# Altium PCB PCB1.PcbDoc
Units mm, origin at the board's own origin, x right, y up, seen from the top; angles counter-clockwise.
Board outline 60 x 30 mm, 2 copper layers (Top Layer, Bottom Layer); 19 components, 55 nets, 113 pads, 0 vias.
Unrouted connection lines stored in the file: 48.
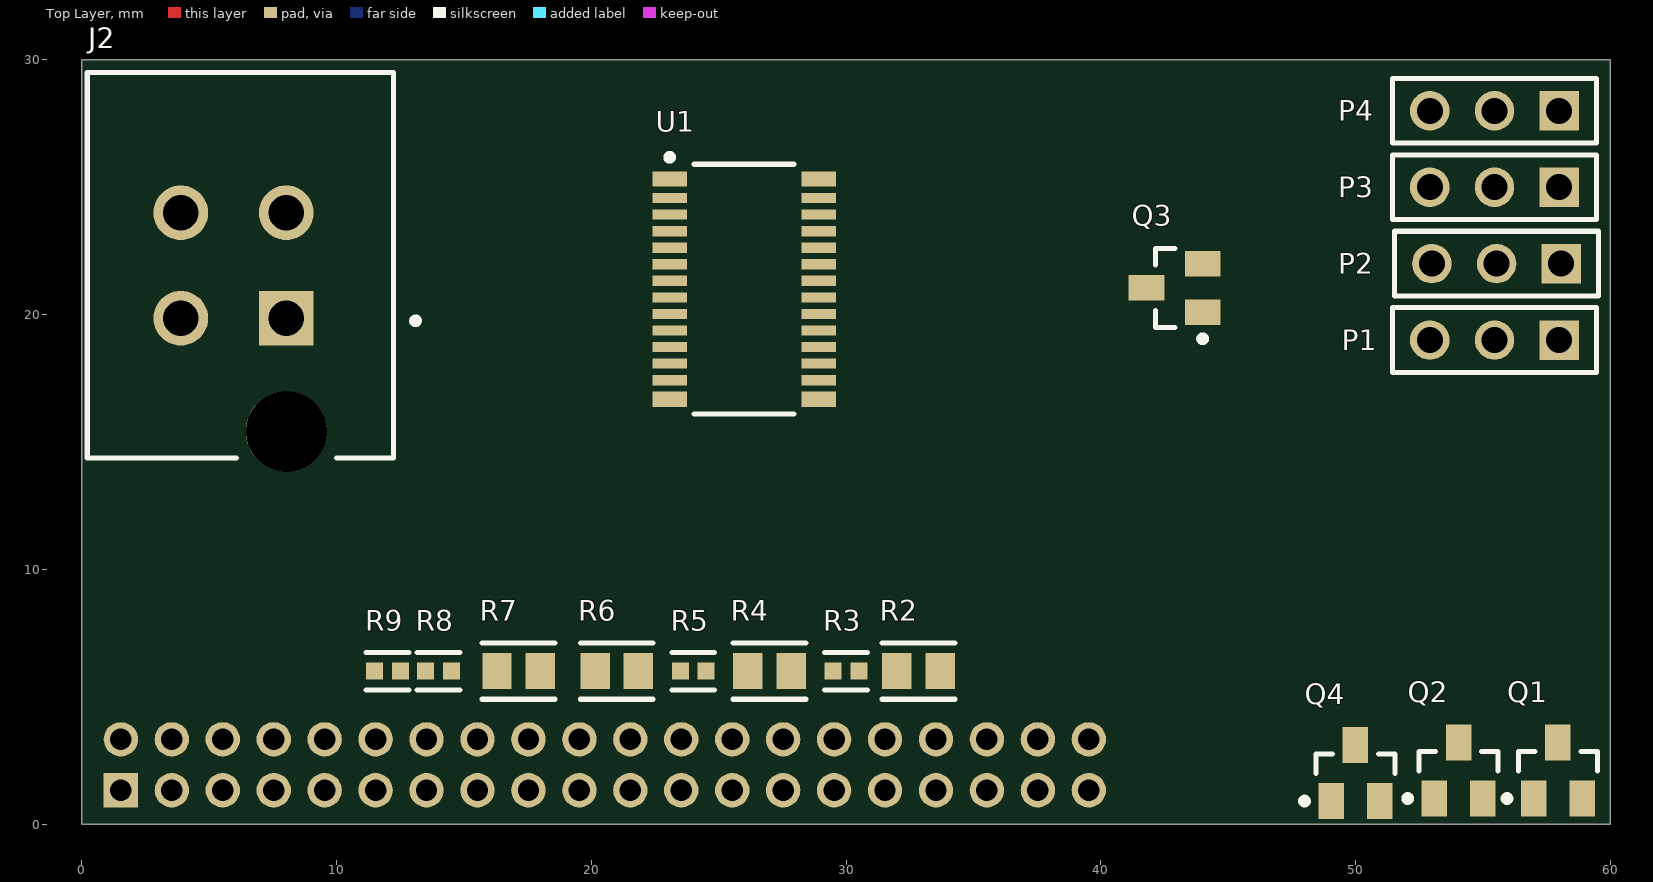
[diagram p0: Top Layer view]
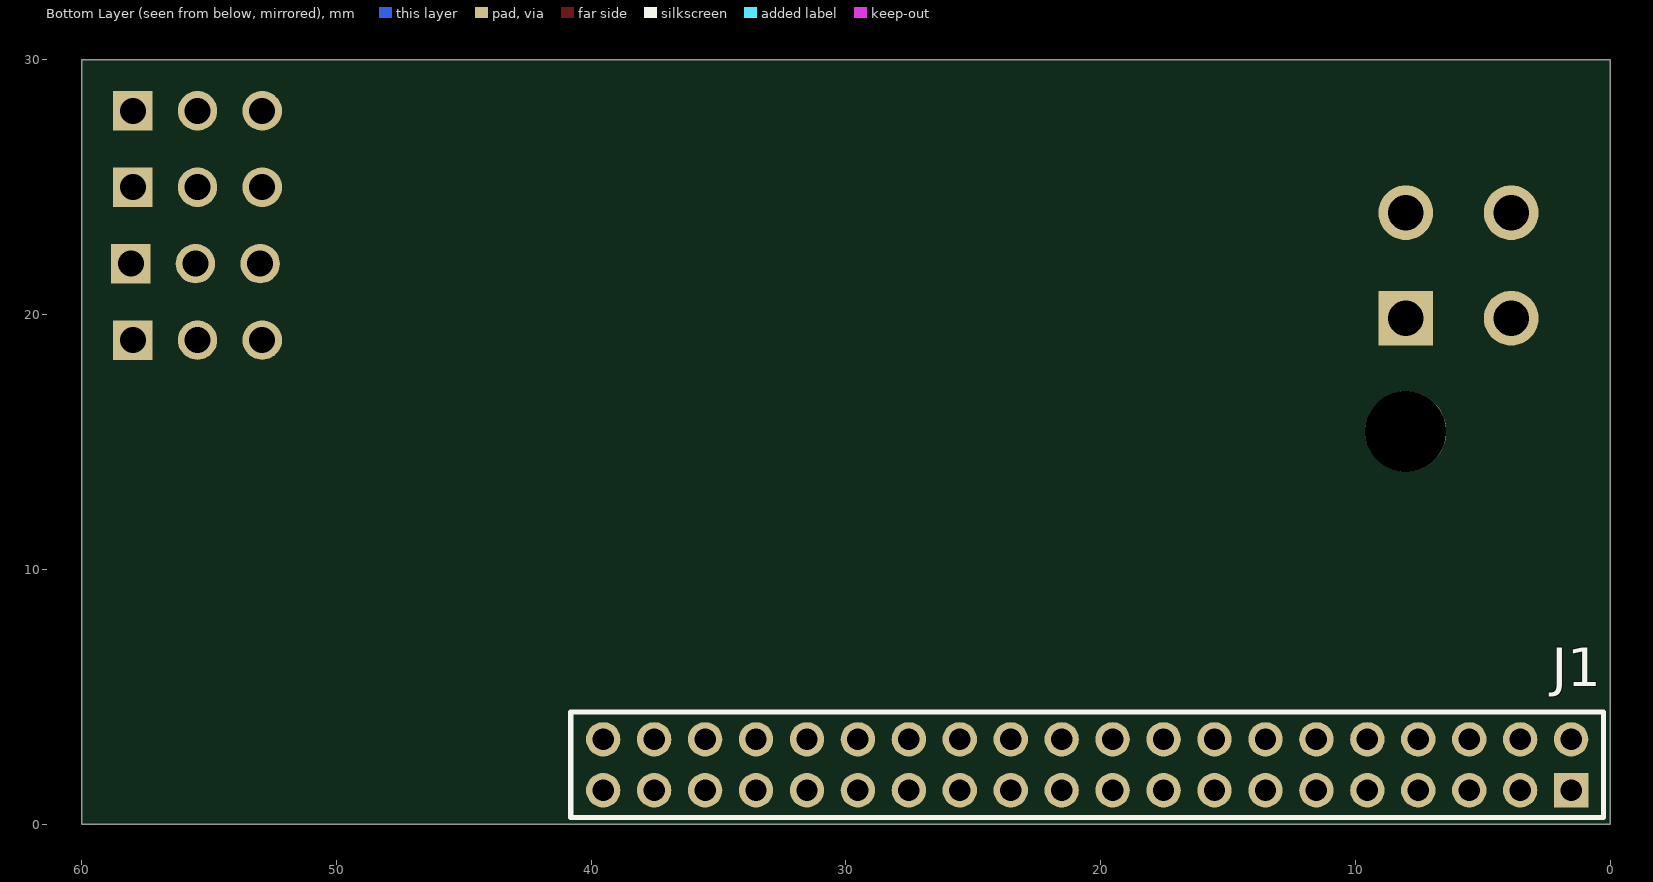
[diagram p1: Bottom Layer view, seen from below]

## Layer stack, top to bottom
Top Solder: solder mask 0.0102, Solder Resist, Dk 3.5
Top Layer: signal copper 0.0356
Dielectric 1: dielectric 0.32, FR-4, Dk 4.8
Bottom Layer: signal copper 0.0356
Bottom Solder: solder mask 0.0102, Solder Resist, Dk 3.5

## Board outline
60,0 0,0 0,30 60,30

## Design rules (kind name [scope] priority, off if disabled: settings)
BoardOutlineClearance [All] p1: gap=0.2 ignorepadtopadclearanceinfootprint=FALSE
Clearance [All] p1: gap=0.127 ignorepadtopadclearanceinfootprint=FALSE except(0.25: Arc-Hole Track-Hole SMDPad-Hole THPad-Hole Via-Hole Fill-Hole Poly-Hole Region-Hole Text-Hole)
ComponentClearance [All] p1: gap=0.127 collisioncheckmode=3 verticalgap=0.127 showdistances=TRUE
DiffPairsRouting [All] p1: maxlimit=0.254 minlimit=0.127 mostfreqgap=0.127 toplayer_minwidth=0.127 toplayer_maxwidth=25.4 toplayer_prefwidth=0.127 bottomlayer_minwidth=0.127 bottomlayer_maxwidth=25.4 bottomlayer_prefwidth=0.127 maxuncoupledlength=12.7
Height [All] p1: minheight=0 maxheight=1816.048 prefheight=12.7
HoleSize [All] p1: absolutevalues=TRUE maxlimit=6.3 minlimit=0.3 maxpercent=80.000 minpercent=20.000
HoleToHoleClearance [All] p1: gap=0.25 allowstackedmicrovias=FALSE
MinimumAnnularRing [All] p1: minimumring=0.076
MinimumSolderMaskSliver [All] p1: minsoldermaskwidth=0
PlaneClearance [All] p1: clearance=0.127
PlaneConnect PlaneConnectPowerPads [InPadClass('PowerPads')] p1: planeconnectstyle=Direct reliefexpansion=0.508 reliefentries=4 reliefconductorwidth=0.254 reliefairgap=0.254
PlaneConnect [All] p2: pad.planeconnectstyle=Relief pad.reliefexpansion=0.3 pad.reliefentries=4 pad.reliefconductorwidth=0.127 pad.reliefairgap=0.127 via.planeconnectstyle=Direct via.reliefexpansion=0.3 via.reliefentries=4 via.reliefconductorwidth=0.127 via.reliefairgap=0.127
PolygonConnect PolygonConnectPowerPads [All vs (InPadClass('PowerPads'))] p1: connectstyle=Direct reliefconductorwidth=0.254 reliefentries=4 polygonreliefangle="90 Angle" airgapwidth=0.254
PolygonConnect [All] p2: thpad.connectstyle=Relief thpad.reliefconductorwidth=0.127 thpad.reliefentries=4 thpad.polygonreliefangle="90 Angle" thpad.airgapwidth=0.127 smdpad.connectstyle=Relief smdpad.reliefconductorwidth=0.127 smdpad.reliefentries=4 smdpad.polygonreliefangle="90 Angle" smdpad.airgapwidth=0.127 via.connectstyle=Direct via.reliefconductorwidth=0.127 via.reliefentries=4 via.polygonreliefangle="90 Angle" via.airgapwidth=0.127
RoutingVias [All] p1: holewidth=0.3 width=0.6 viastyle="Through Hole" minholewidth=0.3 minwidth=0.6 maxholewidth=0.6 maxwidth=6.6
SilkToSilkClearance [All] p1: silktosilkclearance=0
SilkToSolderMaskClearance [IsPad] p1: minsilkscreentomaskgap=0.127 clearancetoexposedcopper=TRUE
SolderMaskExpansion [All] p1: expansion=0.075 istentingtop=FALSE
SupplyNets "Schematic Supply Nets" [InNet('Black (E-)')] p1: voltage=0.000
SupplyNets "Schematic Supply Nets_4" [InNet('5V')] p2: voltage=0.000
SupplyNets "Schematic Supply Nets_3" [InNet('3V3')] p3: voltage=0.000
Width [All] p1: maxlimit=25.4 minlimit=0.127 preferedwidth=0.127 minimp=50.000000 maximp=50.000000 favimp=50.000000
20 further rules are at their usual default settings.

## Classes and differential pairs
component class Main: J2

## Components (designator, comment, footprint, x,y, rotation, side; value= is the part's Value field where it differs from the comment)
J1 "PTF-120-01-L-D" SMTC-PTF-120-01-X-D 1.532,1.325 r0 bottom
J2 "" FP-1-770174-1-MFG 6.22,21.935 r270 top
P1 "TSW-103-07-T-S" SMTC-TSW-103-07-X-S 58,19 r180 top
P2 "TSW-103-07-T-S" SMTC-TSW-103-07-X-S 58.08,22 r180 top
P3 "TSW-103-07-T-S" SMTC-TSW-103-07-X-S 58,25 r180 top
P4 "TSW-103-07-T-S" SMTC-TSW-103-07-X-S 58,28 r180 top
Q1 "MMBT3906" FAIR-SOT23-3_V 57.95,2.1 r90 top
Q2 "MMBT3906" FAIR-SOT23-3_V 54.05,2.1 r90 top
Q3 "MMBT3906" FAIR-SOT23-3_V 42.9,21.05 r180 top
Q4 "MMBT3906" FAIR-SOT23-3_V 50,2 r90 top
R2 "10kΩ" FP-TFCR0805-IPC_B 32.851,6 r0 top
R3 "1kΩ" FP-TFCR0402-IPC_A 30,6 r0 top
R4 "10kΩ" FP-TFCR0805-IPC_B 27,6 r0 top
R5 "1kΩ" FP-TFCR0402-IPC_A 24,6 r0 top
R6 "10kΩ" FP-TFCR0805-IPC_B 21,6 r0 top
R7 "10kΩ" FP-TFCR0805-IPC_B 17.149,6 r0 top
R8 "1kΩ" FP-TFCR0402-IPC_A 14,6 r0 top
R9 "1kΩ" FP-TFCR0402-IPC_A 12,6 r0 top
U1 "PCA9685PW/Q900,118" SOT361-1_V 26,21 r0 top

## Footprints (in the part's own frame and the unit in brackets; to place one, negate y for a bottom-side part, rotate by r counter-clockwise, add the part's x,y. Pads: shape width x height; smd on the part's side, far side on the other; paste and mask are expansions set on the pad)
FAIR-SOT23-3_V [mm] "SOT23, 3-Leads, Body 3.12x1.5mm, Pitch 0.95mm"
  rect 1.4x1 smd: 1(-1.1,0.95) 2(-1.1,-0.95) 3(1.1,0)
  silkscreen extent -1.22,-1.55 0.75,2.12, body extent -1.35,-1.56 1.35,1.56, height 1.2
FP-1-770174-1-MFG [mm]
  rect 2.15x2.15 hole 1.4 paste-2539.97 mask+0: 1(2.075,1.805)
  round 2.15 hole 1.4 paste-2539.97 mask+0: 2(-2.065,1.805) 3(2.075,-2.335) 4(-2.065,-2.335)
  round 3.18 hole 3.18 unplated paste-2539.97 mask+0: ""(6.525,1.805)
  silkscreen extent -7.57,-6.01 7.57,7, body extent -7.67,-6.11 8.22,6.11, height 0.25
FP-TFCR0402-IPC_A [mm]
  rect 0.665x0.672 smd paste+0 mask+0: 1(-0.504,0) 2(0.504,0)
  silkscreen extent -0.84,-0.74 0.84,0.74, body extent -1.04,-0.54 1.04,0.54, height 0.25
FP-TFCR0805-IPC_B [mil]
  rect 45.5x55.44 smd paste+0 mask+0: 1(-33.51,0) 2(33.51,0)
  silkscreen extent -56,-43 56,43, body extent -66,-38 66,38, height 10
SMTC-PTF-120-01-X-D [mm] "Press Fit Socket Assembly, 2x8 Pins, Vertical, 2mm Pitch, Female"
  rect 1.35x1.35 hole 0.838: 1(0,0)
  round 1.35 hole 0.838: 2(0,-2) 3(2,0) 4(2,-2) 5(4,0) 6(4,-2) 7(6,0) 8(6,-2) 9(8,0) 10(8,-2) 11(10,0) 12(10,-2) 13(12,0) 14(12,-2) 15(14,0) 16(14,-2) 17(16,0) 18(16,-2) 19(18,0) 20(18,-2) 21(20,0) 22(20,-2) 23(22,0) 24(22,-2) 25(24,0) 26(24,-2) 27(26,0) 28(26,-2) 29(28,0) 30(28,-2) 31(30,0) 32(30,-2) 33(32,0) 34(32,-2) 35(34,0) 36(34,-2) 37(36,0) 38(36,-2) 39(38,0) 40(38,-2)
  silkscreen extent -1.27,-3.08 39.27,1.07, body extent -1.15,-3 39.15,1, height 6.35
SMTC-TSW-103-07-X-S [mm] ".025 SQ Post Terminal Strip Assembly, 1x3 Pins, Vertical, 2.54mm Pitch, Male"
  rect 1.55x1.55 hole 1.02: 1(0,0)
  round 1.55 hole 1.02: 2(2.54,0) 3(5.08,0)
  silkscreen extent -1.46,-1.27 6.54,1.27, body extent -1.27,-1.27 6.35,1.27, height 8.38
SOT361-1_V [mm] "SOP, 28-Leads, Body 9.7x4.4mm, Pitch 0.65mm, NXP Recommended"
  rect 1.35x0.6 smd: 1(-2.925,4.325) 14(-2.925,-4.325) 15(2.925,-4.325) 28(2.925,4.325)
  rect 1.35x0.4 smd: 2(-2.925,3.575) 3(-2.925,2.925) 4(-2.925,2.275) 5(-2.925,1.625) 6(-2.925,0.975) 7(-2.925,0.325) 8(-2.925,-0.325) 9(-2.925,-0.975) 10(-2.925,-1.625) 11(-2.925,-2.275) 12(-2.925,-2.925) 13(-2.925,-3.575) 16(2.925,-3.575) 17(2.925,-2.925) 18(2.925,-2.275) 19(2.925,-1.625) 20(2.925,-0.975) 21(2.925,-0.325) 22(2.925,0.325) 23(2.925,0.975) 24(2.925,1.625) 25(2.925,2.275) 26(2.925,2.925) 27(2.925,3.575)
  silkscreen extent -3.05,-4.9 1.96,5.3, body extent -2.2,-4.85 2.2,4.85, height 1.1

## Part data
J1: library part CMP-1022-00122-1, "Press Fit Socket, Through-hole, Vertical, -55 to 125 degC, 2 mm Pitch, 40-Pin, Female, RoHS", Manufacturer=Samtec, Temperature Range="-55 to 125 degC", ComponentLink1Description="Manufacturer URL", ComponentLink1URL=http://www.samtec.com, ComponentLink2Description=Datasheet, ComponentLink2URL=http://www.samtec.com/documents/webfiles/pdf/PTF.PDF, ComponentLink3Description="Package Specification", ComponentLink3URL=http://www.samtec.com/documents/webfiles/cpdf/PTF-1XX-XX-X-D-XXX-MKT.pdf, DatasheetVersion=F-214, Mounting Technology=Through-hole, Orientation=Vertical, PackageDescription="2mm Press Fit Socket Assembly", PackageReference=PTF-120-01-X-D, PackageVersion="H, 4/2000", PartNumber=PTF-120-01-L-D, Pitch="2 mm", RoHS=True
J2: library part CMP-03369-000042-1, "CONN HEADER VERT 4POS 4.14MM", Current Rating=9.5A, Manufacturer="TE Connectivity", Manufacturer Part Number=1-770174-1, Temperature="-55°C to +105°C", Temperature Range High=+105°C, Temperature Range Low=-55°C, Voltage Rating=600V, Automotive=No, Category=Conn, ComponentLink2Description=Datasheet, ComponentLink2URL=https://www.te.com/commerce/DocumentDelivery/DDEController?Action=showdoc&DocId=Catalog+Section%7F82181_SOFTSHELL_HIGH_DENSITY%7F0508%7Fpdf%7FEnglish%7FENG_CS_82181_SOFTSHELL_HIGH_DENSITY_0508.pdf%7F1-770174-1, Conn Gender=Male, Conn Orientation=Vertical, Contact Material=Tin,Nickel, Device Class L1=Connectors, Device Class L2="Headers and Wire Housings", Device Class L3=unset, Digikey Description="CONN HEADER VERT 4POS 4.14MM", Footprint Url=https://www.te.com/commerce/DocumentDelivery/DDEController?Action=showdoc&DocId=Customer+Drawing%7F770174%7FM%7Fpdf%7FEnglish%7FENG_CD_770174_M.pdf%7F1-770174-1, Height=14.51mm, Lead Free=Yes, Mouser Description="Pin & Socket Connectors HEADER 4 POS GOLD DUAL ROW", Number of Contacts=4, Number of Rows=2, Octopart=https://octopart.com/1-770174-1-te+connectivity-46507490, Package=1-770174-1, Pitch=4.14mm, RoHS=TRUE, Standoff Height=0.63mm
P1 P2 P3 P4: library part CMP-1024-00332-1, "0.025\" SQ Post Header, Through-hole, Vertical, -55 to 105 degC, 2.54 mm Pitch, 3-Pin, Male, RoHS", Manufacturer=Samtec, Temperature Range="-55 to 105 degC", ComponentLink1Description="Manufacturer URL", ComponentLink1URL=http://www.samtec.com, ComponentLink2Description=Datasheet, ComponentLink2URL=http://www.samtec.com/documents/webfiles/pdf/TSW_TH.PDF, ComponentLink3Description="Package Specification", ComponentLink3URL=http://www.samtec.com/documents/webfiles/cpdf/TSW-XXX-XX-XXX-X-XX-XXX-MKT.pdf, DatasheetVersion=F-214, Mounting Technology=Through-hole, Orientation=Vertical, PackageDescription=".025[0.64] SQ. Post Terminal Strip Assembly", PackageReference=TSW-103-07-X-S, PackageVersion="DM, 8/1988", PartNumber=TSW-103-07-T-S, Pitch="2.54 mm", RoHS=True
Q1 Q2 Q3 Q4: library part CMP-1670-00011-1, "PNP General-Purpose Amplifier, 40 V, 0.2 A, -55 to 150 degC, 3-Pin SOT23, RoHS, Tape and Reel", Capacitance="1 uF", Case\Package=Radial, Max Operating Temperature="105 degC", Min Operating Temperature="-55 degC", Package Quantity=200, Tolerance=20%, Voltage Rating="50 V", ComponentLink1Description="Manufacturer URL", ComponentLink1URL=https://www.fairchildsemi.com/, ComponentLink2Description=Datasheet, ComponentLink2URL=https://www.fairchildsemi.com/datasheets/MM/MMBT3906.pdf, ComponentLink3Description="Package Specification", ComponentLink3URL=http://www.fairchildsemi.com/dwg/MA/MA03D.pdf, DatasheetVersion="Rev. 1.2.2, 04/2014", Diameter="5 mm", Height="11 mm", Lead Pitch="2 mm", Length="12 mm", Mount="Through Hole", PackageDescription="3-Pin Small Outline Transistor, Body 2.92 x 1.325 mm, Pitch 0.95 mm", PackageReference=SOT23-3, Packaging=Bulk, Pins=2, Radiation Hardening=No, REACH SVHC="No SVHC", RoHSCompliant=true, Voltage Rating (DC)="50 V", Width="0 inch"
R2 R4 R6 R7: library part CMP-250906-173936-1, "RES Thin Film,  10kΩ, 0.1%, 0.1W, 50ppm/°C, 0805"
R3 R5 R8 R9: library part CMP-250906-288381-1, "RES Thin Film,  1kΩ, 0.1%, 0.063W, 50ppm/°C, 0402", RoHS Compliant=Yes
U1: library part CMP-1595-00002-2, "16-Channel, 12-Bit PWM Fm+ I2C-Bus LED Controller, 2.3 to 5.5 V, -40 to 85 degC, 28-Pin TSSOP (SOT361-1), RoHS, Tape and Reel", Frequency="25000000 Hz", PartNumber=PCA9685, Supply Current Max="10 mA", Supply Voltage Max="5.5 V", Supply Voltage Min="2.3 V", Temperature Max="85 degC", Temperature Min="-40 degC", Code_JEDEC=MO-153, ComponentLink1Description="Manufacturer URL", ComponentLink1URL=http://www.nxp.com/, ComponentLink2Description=Datasheet, ComponentLink2URL=http://www.nxp.com/documents/data_sheet/PCA9685.pdf, ComponentLink3Description="Package Specification", ComponentLink3URL=http://www.nxp.com/documents/outline_drawing/sot361-1_po.pdf, DatasheetVersion="Rev. 4", Mounting Technology="Surface Mount", PackageDescription="28-Pin Small Outline Package, Body 9.7 x 4.4 mm, Pitch 0.65 mm", PackageVersion=02/2003, Packing="Tape and Reel", RoHS=TRUE

## Nets (pads, with @x,y where several pads share a name; then routed paths per layer and width w, separated by ;. In a path a pad name is that pad's centre, name@x,y a point inside that pad or via, vN(x,y) a via of type N, cw(c..) or ccw(c..) an arc to the next point about the centre after c; other vN are vias at no path point)
3V3: J1.1 J1.17
5V: J1.2 J1.4 P1.2 P2.2 P3.2 P4.2 R2.2 R4.2 R6.2 R7.2 U1.28
10V: J2.3
"12C SCL": J1.5 U1.26
"12C SDA": J1.3 U1.27
"Black (E-)": J1.6 J1.9 J1.14 J1.20 J1.25 J1.30 J1.34 J1.39 J2.2 J2.4 P1.1 P2.1 P3.1 P4.1 Q1.2 Q2.2 Q3.2 Q4.2 U1.14
EEPROM: J1.28
GPCLK0: J1.7 U1.25
"GPIO 0": J1.27
"GPIO 5": J1.29
"GPIO 6": J1.31
"GPIO 9": J1.21
"GPIO 10": J1.19
"GPIO 11": J1.23
"GPIO 12": J1.32
"GPIO 13": J1.33
"GPIO 16": J1.36
"GPIO 19": J1.35
"GPIO 20": J1.38
"GPIO 21": J1.40
"GPIO 23": J1.16
"GPIO 24": J1.18
"GPIO 25": J1.22
"GPIO 26": J1.37
"Green (S+)": 
Knapp0: J1.11
Knapp1: J1.13
Knapp2: J1.15
NetC7_2: 
NetC9_2: 
NetC10_1: 
NetC10_2: 
NetIC2_2: 
NetIC2_4: 
NetIC2_11: 
NetIC2_12: 
NetP1_3: P1.3 Q1.3 R2.1
NetP2_3: P2.3 Q2.3 R4.1
NetP3_3: P3.3 Q3.3 R6.1
NetP4_3: P4.3 Q4.3 R7.1
NetQ1_1: Q1.1 R3.2
NetQ2_1: Q2.1 R5.2
NetQ3_1: Q3.1 R8.2
NetQ4_1: Q4.1 R9.2
"PCM CLK": J1.12
PWM0: R3.1 U1.6
PWM1: R5.1 U1.7
PWM2: R8.1 U1.8
PWM3: R9.1 U1.9
"RED (E+)": 
SPI0: J1.26
"SPI0 CE0": J1.24
"USART RX": J1.10
"USART TX": J1.8
"White (S-)": 
pads on no net: J2. J2.1 U1.1 U1.2 U1.3 U1.4 U1.5 U1.10 U1.11 U1.12 U1.13 U1.15 U1.16 U1.17 U1.18 U1.19 U1.20 U1.21 U1.22 U1.23 U1.24